# Altium PCB BCM_ECU_revA_V2.PcbDoc (part 3 of 4)
Units mm, origin at the board's own origin, x right, y up, seen from the top; angles counter-clockwise.
Board outline 170 x 110 mm, 4 copper layers (TOP SIG, GND, PWR, BOT SIG), stack 0.603 mm thick; 422 components, 413 nets, 1412 pads, 185 vias.
Unrouted connection lines stored in the file: 642.
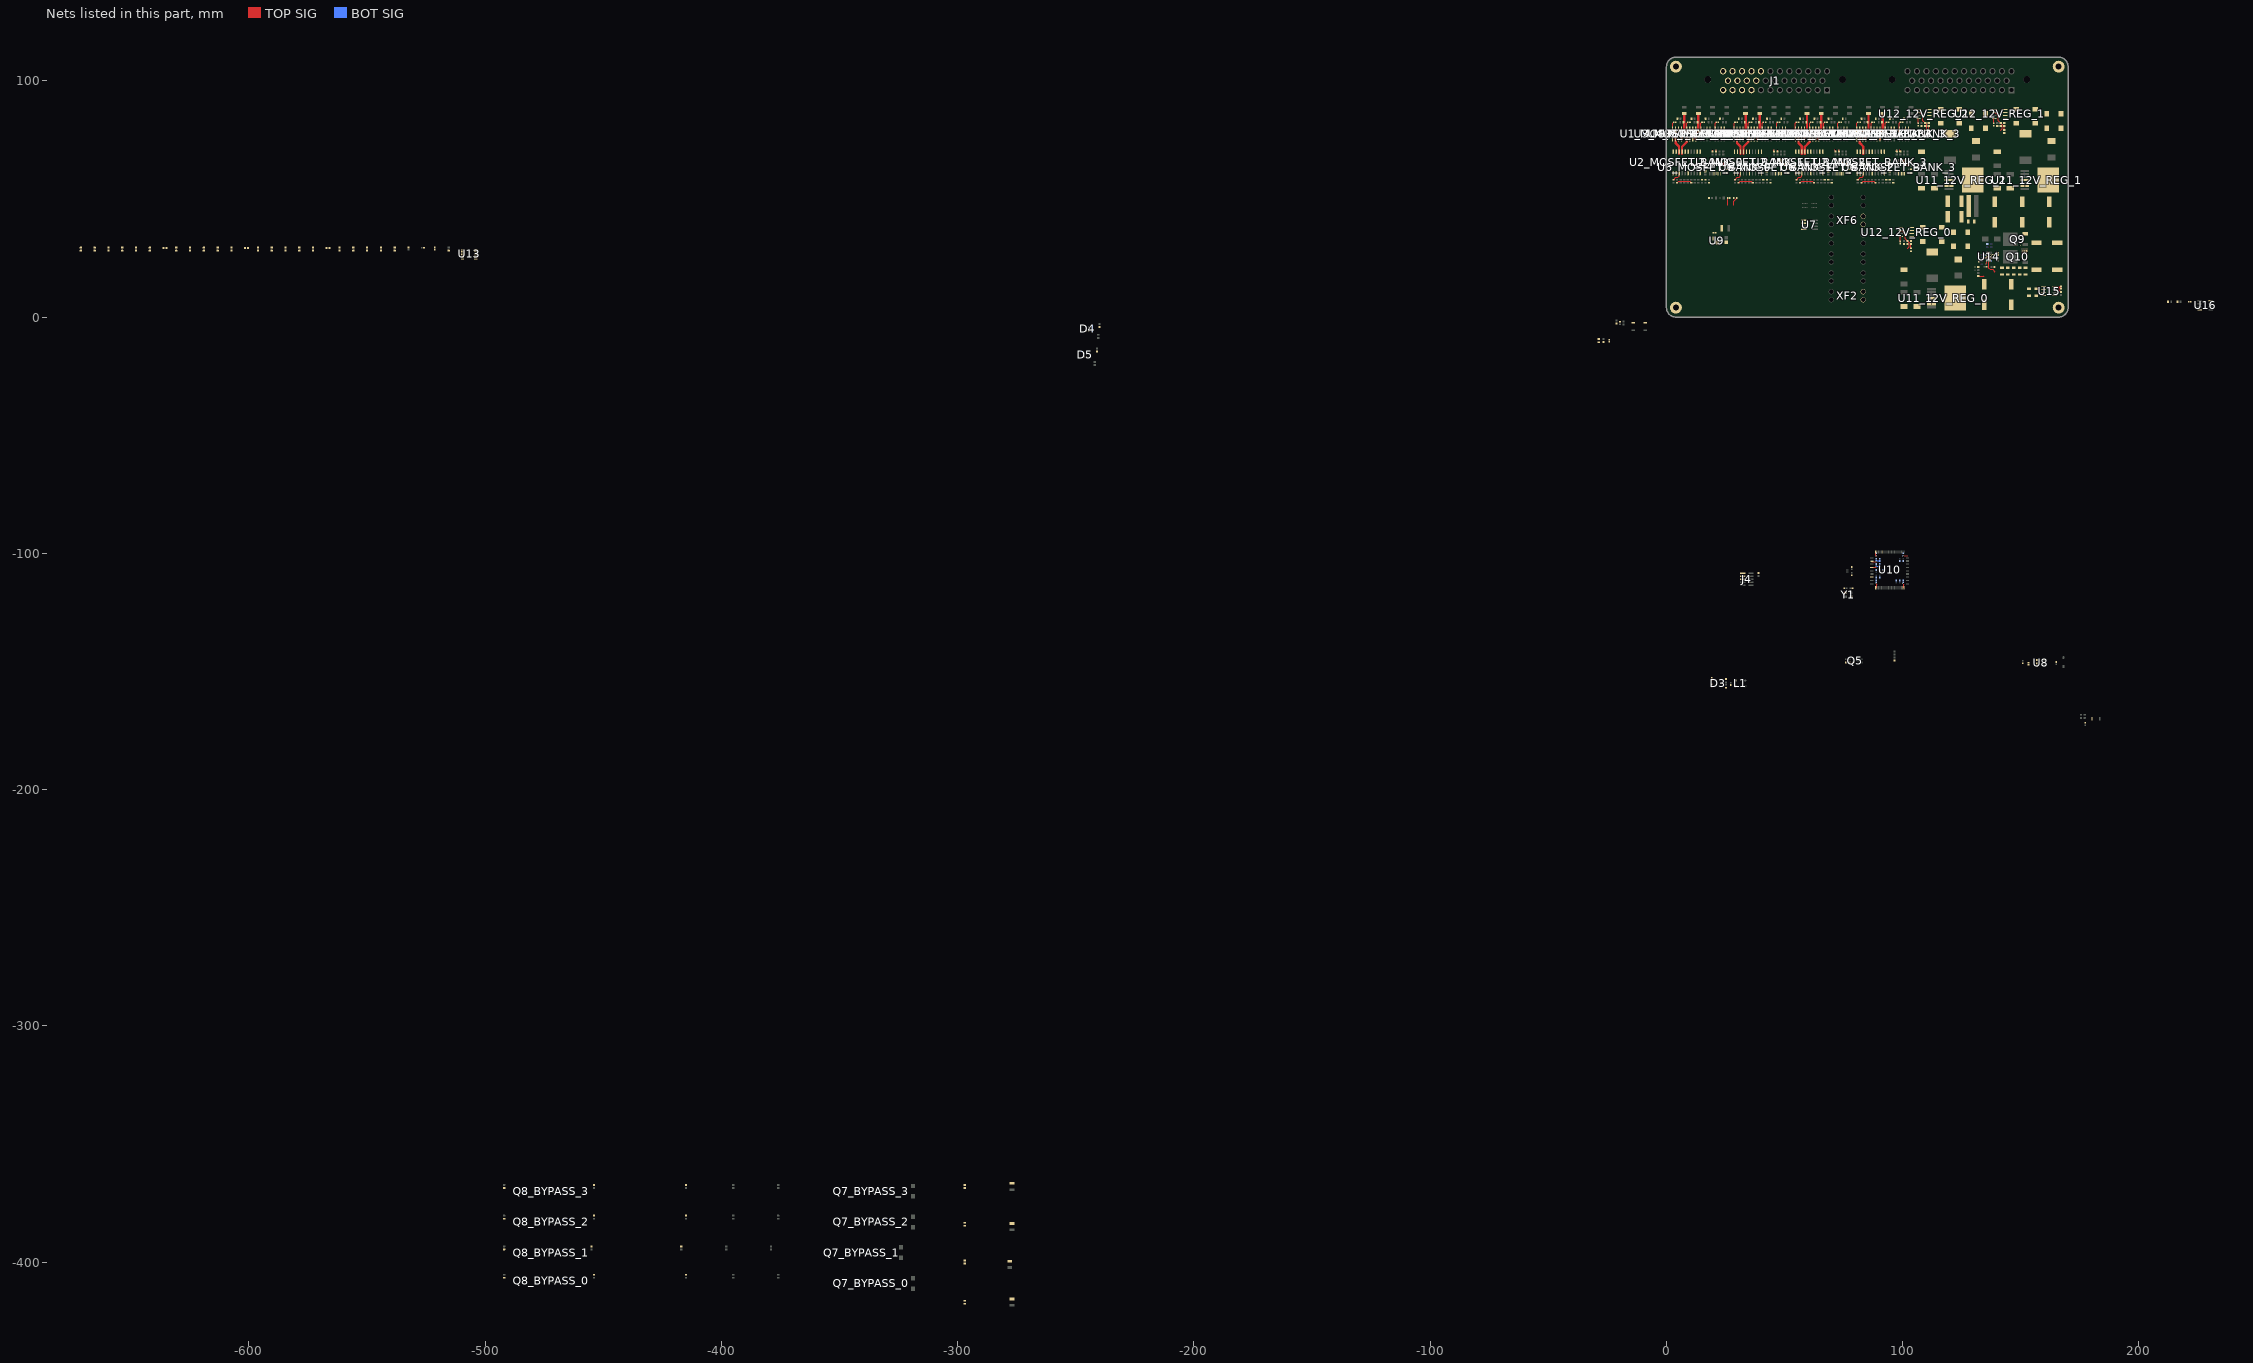
[diagram p3: the nets of this part, all layers, seen from the top]

## Via types
v1: diameter 0.5, hole 0.3, TOP SIG to BOT SIG, 181 vias
v2: diameter 0.5, hole 0.3, TOP SIG to BOT SIG, tented both sides, 4 vias

## Nets (pads, with @x,y where several pads share a name; then routed paths per layer and width w, separated by ;. In a path a pad name is that pad's centre, name@x,y a point inside that pad or via, vN(x,y) a via of type N, cw(c..) or ccw(c..) an arc to the next point about the centre after c; other vN are vias at no path point) (continued)
EXT_IN_2: F6_BYPASS_2.1 J1.31
EXT_IN_3: F6_BYPASS_3.1 J1.32
G_LED: R43.1 U10.15
GATE_BYPASS_0: Q7_BYPASS_0.4 R56_BYPASS_0.2 R57_BYPASS_0.1
GATE_BYPASS_1: Q7_BYPASS_1.4 R56_BYPASS_1.2 R57_BYPASS_1.1
GATE_BYPASS_2: Q7_BYPASS_2.4 R56_BYPASS_2.2 R57_BYPASS_2.1
GATE_BYPASS_3: Q7_BYPASS_3.4 R56_BYPASS_3.2 R57_BYPASS_3.1
GND: C1_MOSFET_BANK_0.2 C1_MOSFET_BANK_1.2 C1_MOSFET_BANK_2.2 C1_MOSFET_BANK_3.2 C2_MOSFET_BANK_0.2 C2_MOSFET_BANK_1.2 C2_MOSFET_BANK_2.2 C2_MOSFET_BANK_3.2 C3_MOSFET_BANK_0.2 C3_MOSFET_BANK_1.2 C3_MOSFET_BANK_2.2 C3_MOSFET_BANK_3.2 C4_MOSFET_BANK_0.2 C4_MOSFET_BANK_1.2 C4_MOSFET_BANK_2.2 C4_MOSFET_BANK_3.2 C5_MOSFET_BANK_0.2 C5_MOSFET_BANK_1.2 C5_MOSFET_BANK_2.2 C5_MOSFET_BANK_3.2 C6_MOSFET_BANK_0.2 C6_MOSFET_BANK_1.2 C6_MOSFET_BANK_2.2 C6_MOSFET_BANK_3.2 C7_MOSFET_BANK_0.2 C7_MOSFET_BANK_1.2 C7_MOSFET_BANK_2.2 C7_MOSFET_BANK_3.2 C8.2 C9.2 C10.2 C11.2 C12.2 C13.2 C14.1 C15.1 C16.2 C17.1 C18.2 C19.2 C20.2 C21.2 C23.2 C24.2 C25.2 C26.2 C27.2 C28.2 C29.2 C30.2 C31.2 C32.2 C33.2 C34.2 C35.2 C36.2 C37.2 C38.2 C39.2 C40_12V_REG_0.1 C40_12V_REG_1.1 C40_12V_REG_2.1 C41_12V_REG_0.1 C41_12V_REG_1.1 C41_12V_REG_2.1 C42_12V_REG_0.1 C42_12V_REG_1.1 C42_12V_REG_2.1 C43_12V_REG_0.1 C43_12V_REG_1.1 C43_12V_REG_2.1 C44_12V_REG_0.1 C44_12V_REG_1.1 C44_12V_REG_2.1 C45_12V_REG_0.1 C45_12V_REG_1.1 C45_12V_REG_2.1 C46_12V_REG_0.1 C46_12V_REG_1.1 C46_12V_REG_2.1 C48_12V_REG_0.2 C48_12V_REG_1.2 C48_12V_REG_2.2 C49.2 C50.2 C51.2 C52.1 C53.1 C54.1 C55.1 C56.1 C57.1 C58.1 C59.2 C60.2 C61.2 C62.2 C63.2 C64.2 C65.2 C67.2 C68.1 C69.2 C70.2 C71.2 C72.2 C73.2 C74.2 C75.2 C76.2 C77.2 D3.3 D6_12V_REG_0.2 D6_12V_REG_1.2 D6_12V_REG_2.2 D8.2 J4.3 J4.5 pad.2 Q5.2 Q8_BYPASS_0.1 Q8_BYPASS_1.1 Q8_BYPASS_2.1 Q8_BYPASS_3.1 Q10.3 R12_MOSFET_BANK_0.2 R12_MOSFET_BANK_1.2 R12_MOSFET_BANK_2.2 R12_MOSFET_BANK_3.2 R22_MOSFET_BANK_0.2 R22_MOSFET_BANK_1.2 R22_MOSFET_BANK_2.2 R22_MOSFET_BANK_3.2 R23_MOSFET_BANK_0.2 R23_MOSFET_BANK_1.2 R23_MOSFET_BANK_2.2 R23_MOSFET_BANK_3.2 R24_MOSFET_BANK_0.2 R24_MOSFET_BANK_1.2 R24_MOSFET_BANK_2.2 R24_MOSFET_BANK_3.2 R25_MOSFET_BANK_0.2 R25_MOSFET_BANK_1.2 R25_MOSFET_BANK_2.2 R25_MOSFET_BANK_3.2 R27.1 R31.1 R32.1 R41.1 R45.1 R48_12V_REG_0.2 R48_12V_REG_1.2 R48_12V_REG_2.2 R49_12V_REG_0.2 R49_12V_REG_1.2 R49_12V_REG_2.2 R57_BYPASS_0.2 R57_BYPASS_1.2 R57_BYPASS_2.2 R57_BYPASS_3.2 R59_BYPASS_0.1 R59_BYPASS_1.1 R59_BYPASS_2.1 R59_BYPASS_3.1 R77.1 R78.1 R79.1 R80.1 R81.1 R82.1 R83.1 R84.1 R91.2 R92.2 R94.2 SW1.1 SW3.2 U1_MOSFET_BANK_0.5 U1_MOSFET_BANK_1.5 U1_MOSFET_BANK_2.5 U1_MOSFET_BANK_3.5 U2_MOSFET_BANK_0.2 U2_MOSFET_BANK_0.6 U2_MOSFET_BANK_1.2 U2_MOSFET_BANK_1.6 U2_MOSFET_BANK_2.2 U2_MOSFET_BANK_2.6 U2_MOSFET_BANK_3.2 U2_MOSFET_BANK_3.6 U3_MOSFET_BANK_0.5 U3_MOSFET_BANK_1.5 U3_MOSFET_BANK_2.5 U3_MOSFET_BANK_3.5 U4_MOSFET_BANK_0.5 U4_MOSFET_BANK_1.5 U4_MOSFET_BANK_2.5 U4_MOSFET_BANK_3.5 U5_MOSFET_BANK_0.5 U5_MOSFET_BANK_1.5 U5_MOSFET_BANK_2.5 U5_MOSFET_BANK_3.5 U6_MOSFET_BANK_0.3 U6_MOSFET_BANK_0.12 U6_MOSFET_BANK_1.3 U6_MOSFET_BANK_1.12 U6_MOSFET_BANK_2.3 U6_MOSFET_BANK_2.12 U6_MOSFET_BANK_3.3 U6_MOSFET_BANK_3.12 U7.5 U8.2 U9.2 U10.10 U10.19 U10.26 U10.49 U10.74 U10.99 U11_12V_REG_0.4 U11_12V_REG_0.8 U11_12V_REG_1.4 U11_12V_REG_1.8 U11_12V_REG_2.4 U11_12V_REG_2.8 U12_12V_REG_0.5 U12_12V_REG_1.5 U12_12V_REG_2.5 U13.3 U13.12 U14.10 U14.14 U14.19 U14.21 U15.5 U16.4 Y1.2 Y1.4
  other v1: 150.5,27.25 151.25,27.25 152,27.25 152.75,27.25 139.749,27.5 150.5,28 151.25,28 152,28 152.75,28 150.5,28.75 151.25,28.75 152,28.75 152.75,28.75 149.5,30.25 149.5,31.25 22.62,50.396
  other v2: 135.95,24.95 137.05,24.95 135.95,26.05 137.05,26.05
I_nFAULT: R26.1 U7.6 | length 3.6
  TOP SIG w0.2: 28.505,47.312 28.505,49.056 29.77,50.321 R26.1@29.77,50.396
I_nFAULT_12V_REG_0: R50_12V_REG_0.2 U12_12V_REG_0.6 | length 9.7
  TOP SIG w0.3: U12_12V_REG_0.6@99.184,36.635 99.755,36.635 99.867,36.523 99.867,36.233 101,35.1 101,33.15 R50_12V_REG_0.2@102,32.15 102.075,32.15 102.727,31.498 102.727,29.802 102.075,29.15 102,29.15
I_nFAULT_12V_REG_1: R50_12V_REG_1.2 U12_12V_REG_1.6 | length 9.7
  TOP SIG w0.3: U12_12V_REG_1.6@138.684,86.635 139.255,86.635 139.367,86.523 139.367,86.233 140.5,85.1 140.5,83.15 R50_12V_REG_1.2@141.5,82.15 141.575,82.15 142.227,81.498 142.227,79.802 141.575,79.15 141.5,79.15
I_nFAULT_12V_REG_2: R50_12V_REG_2.2 U12_12V_REG_2.6 | length 9.7
  TOP SIG w0.3: U12_12V_REG_2.6@106.684,86.635 107.255,86.635 107.367,86.523 107.367,86.233 108.5,85.1 108.5,83.15 R50_12V_REG_2.2@109.5,82.15 109.575,82.15 110.227,81.498 110.227,79.802 109.575,79.15 109.5,79.15
I_nFAULT_MOSFET_BANK_0: R10_MOSFET_BANK_0.2 U1_MOSFET_BANK_0.6 U3_MOSFET_BANK_0.6 U4_MOSFET_BANK_0.6 U5_MOSFET_BANK_0.6 | length 15
  TOP SIG w0.3: v1@5,78.054 v1@5.135,78.189 ; v1@5,78.054 v1(5,78) v1@5,78.054 ; v1@5,78.054 v1@5.135,78.189 ; v1@5.135,78.189 U1_MOSFET_BANK_0.6@5.135,79.816 v1@5.135,78.189 ; v1@11,78.054 v1@11.135,78.189 ; v1@11,78.054 v1(11,78) v1@11,78.054 ; v1@11,78.054 v1@11.135,78.189 ; v1@11.135,78.189 U3_MOSFET_BANK_0.6@11.135,79.816 v1@11.135,78.189 ; v1@17,78.054 v1@17.135,78.189 ; v1@17,78.054 v1(17,78) v1@17,78.054 ; v1@17,78.054 v1@17.135,78.189 ; v1@17.135,78.189 U4_MOSFET_BANK_0.6@17.135,79.816 v1@17.135,78.189 ; v1@23,78.054 v1@23.135,78.189 ; v1@23,78.054 v1(23,78) v1@23,78.054 ; v1@23,78.054 v1@23.135,78.189 ; v1@23.135,78.189 U5_MOSFET_BANK_0.6@23.135,79.816 v1@23.135,78.189
  other v1: 5,78 11,78 17,78 23,78
I_nFAULT_MOSFET_BANK_1: R10_MOSFET_BANK_1.2 U1_MOSFET_BANK_1.6 U3_MOSFET_BANK_1.6 U4_MOSFET_BANK_1.6 U5_MOSFET_BANK_1.6 | length 15
  TOP SIG w0.3: v1@31,78.054 v1@31.135,78.189 ; v1@31,78.054 v1@31.135,78.189 ; v1@31,78.054 v1(31,78) v1@31,78.054 ; v1@31.135,78.189 U1_MOSFET_BANK_1.6@31.135,79.816 v1@31.135,78.189 ; v1@37,78.054 v1@37.135,78.189 ; v1@37,78.054 v1@37.135,78.189 ; v1@37,78.054 v1(37,78) v1@37,78.054 ; v1@37.135,78.189 U3_MOSFET_BANK_1.6@37.135,79.816 v1@37.135,78.189 ; v1@43,78.054 v1@43.135,78.189 ; v1@43,78.054 v1@43.135,78.189 ; v1@43,78.054 v1(43,78) v1@43,78.054 ; v1@43.135,78.189 U4_MOSFET_BANK_1.6@43.135,79.816 v1@43.135,78.189 ; v1@49,78.054 v1@49.135,78.189 ; v1@49,78.054 v1@49.135,78.189 ; v1@49,78.054 v1(49,78) v1@49,78.054 ; v1@49.135,78.189 U5_MOSFET_BANK_1.6@49.135,79.816 v1@49.135,78.189
  other v1: 31,78 37,78 43,78 49,78
I_nFAULT_MOSFET_BANK_2: R10_MOSFET_BANK_2.2 U1_MOSFET_BANK_2.6 U3_MOSFET_BANK_2.6 U4_MOSFET_BANK_2.6 U5_MOSFET_BANK_2.6 | length 15
  TOP SIG w0.3: v1@57,78.054 v1@57.135,78.189 ; v1@57,78.054 v1@57.135,78.189 ; v1@57,78.054 v1(57,78) v1@57,78.054 ; v1@57.135,78.189 U1_MOSFET_BANK_2.6@57.135,79.816 v1@57.135,78.189 ; v1@63,78.054 v1@63.135,78.189 ; v1@63,78.054 v1@63.135,78.189 ; v1@63,78.054 v1(63,78) v1@63,78.054 ; v1@63.135,78.189 U3_MOSFET_BANK_2.6@63.135,79.816 v1@63.135,78.189 ; v1@69,78.054 v1@69.135,78.189 ; v1@69,78.054 v1@69.135,78.189 ; v1@69,78.054 v1(69,78) v1@69,78.054 ; v1@69.135,78.189 U4_MOSFET_BANK_2.6@69.135,79.816 v1@69.135,78.189 ; v1@75,78.054 v1@75.135,78.189 ; v1@75,78.054 v1@75.135,78.189 ; v1@75,78.054 v1(75,78) v1@75,78.054 ; v1@75.135,78.189 U5_MOSFET_BANK_2.6@75.135,79.816 v1@75.135,78.189
  other v1: 57,78 63,78 69,78 75,78
I_nFAULT_MOSFET_BANK_3: R10_MOSFET_BANK_3.2 U1_MOSFET_BANK_3.6 U3_MOSFET_BANK_3.6 U4_MOSFET_BANK_3.6 U5_MOSFET_BANK_3.6 | length 15
  TOP SIG w0.3: v1@83,78.054 v1@83.135,78.189 ; v1@83,78.054 v1@83.135,78.189 ; v1@83,78.054 v1(83,78) v1@83,78.054 ; v1@83.135,78.189 U1_MOSFET_BANK_3.6@83.135,79.816 v1@83.135,78.189 ; v1@89,78.054 v1@89.135,78.189 ; v1@89,78.054 v1@89.135,78.189 ; v1@89,78.054 v1(89,78) v1@89,78.054 ; v1@89.135,78.189 U3_MOSFET_BANK_3.6@89.135,79.816 v1@89.135,78.189 ; v1@95,78.054 v1@95.135,78.189 ; v1@95,78.054 v1@95.135,78.189 ; v1@95,78.054 v1(95,78) v1@95,78.054 ; v1@95.135,78.189 U4_MOSFET_BANK_3.6@95.135,79.816 v1@95.135,78.189 ; v1@101,78.054 v1@101.135,78.189 ; v1@101,78.054 v1@101.135,78.189 ; v1@101,78.054 v1(101,78) v1@101,78.054 ; v1@101.135,78.189 U5_MOSFET_BANK_3.6@101.135,79.816 v1@101.135,78.189
  other v1: 83,78 89,78 95,78 101,78
IN_0: J1.9 R61.1 R69.2
IN_1: J1.10 R62.1 R70.2
IN_2: J1.11 R63.1 R71.2
IN_3: J1.12 R64.1 R72.2
IN_4: J1.22 R65.1 R73.2
IN_5: J1.23 R66.1 R74.2
IN_6: J1.33 R67.1 R75.2
IN_7: R68.1 R76.2
INH_EXT_0: R58_BYPASS_0.2
INH_EXT_1: R58_BYPASS_1.2
INH_EXT_2: R58_BYPASS_2.2
INH_EXT_3: R58_BYPASS_3.2
INT_VCC: C16.1 F1.2 U9.3
M1_I_SENSE_MOSFET_BANK_0: R17_MOSFET_BANK_0.2 U1_MOSFET_BANK_0.7 | length 4.6
  TOP SIG w0.3: R17_MOSFET_BANK_0.2@19.5,70.15 v1(19.5,71) ; v1@3.865,78.189 U1_MOSFET_BANK_0.7@3.865,79.816 v1@3.865,78.189 ; v1@3.865,78.189 v1@4,78.054 ; v1@3.865,78.189 v1@4,78.054 ; v1@4,78.054 v1(4,78) v1@4,78.054
  other v1: 4,78
M1_I_SENSE_MOSFET_BANK_1: R17_MOSFET_BANK_1.2 U1_MOSFET_BANK_1.7 | length 4.6
  TOP SIG w0.3: R17_MOSFET_BANK_1.2@45.5,70.15 v1(45.5,71) ; v1@29.865,78.189 U1_MOSFET_BANK_1.7@29.865,79.816 v1@29.865,78.189 ; v1@29.865,78.189 v1@30,78.054 ; v1@29.865,78.189 v1@30,78.054 ; v1@30,78.054 v1(30,78) v1@30,78.054
  other v1: 30,78
M1_I_SENSE_MOSFET_BANK_2: R17_MOSFET_BANK_2.2 U1_MOSFET_BANK_2.7 | length 4.6
  TOP SIG w0.3: R17_MOSFET_BANK_2.2@71.5,70.15 v1(71.5,71) ; v1@55.865,78.189 v1@56,78.054 ; v1@55.865,78.189 U1_MOSFET_BANK_2.7@55.865,79.816 v1@55.865,78.189 ; v1@55.865,78.189 v1@56,78.054 ; v1@56,78.054 v1(56,78) v1@56,78.054
  other v1: 56,78
M1_I_SENSE_MOSFET_BANK_3: R17_MOSFET_BANK_3.2 U1_MOSFET_BANK_3.7 | length 4.6
  TOP SIG w0.3: R17_MOSFET_BANK_3.2@97.5,70.15 v1(97.5,71) ; v1@81.865,78.189 v1@82,78.054 ; v1@81.865,78.189 U1_MOSFET_BANK_3.7@81.865,79.816 v1@81.865,78.189 ; v1@81.865,78.189 v1@82,78.054 ; v1@82,78.054 v1(82,78) v1@82,78.054
  other v1: 82,78
M1_OUT_MOSFET_BANK_0: F2_MOSFET_BANK_0.1 R18_MOSFET_BANK_0.2 U1_MOSFET_BANK_0.3 U1_MOSFET_BANK_0.4 | length 11.4
  TOP SIG w1: U1_MOSFET_BANK_0.4@6.405,75.184 6.405,77.405 7,78 7.5,78.5 F2_MOSFET_BANK_0.1@7.5,86.167
M1_OUT_MOSFET_BANK_1: F2_MOSFET_BANK_1.1 R18_MOSFET_BANK_1.2 U1_MOSFET_BANK_1.3 U1_MOSFET_BANK_1.4 | length 11.4
  TOP SIG w1: U1_MOSFET_BANK_1.4@32.405,75.184 32.405,77.405 33,78 33.5,78.5 F2_MOSFET_BANK_1.1@33.5,86.167
M1_OUT_MOSFET_BANK_2: F2_MOSFET_BANK_2.1 R18_MOSFET_BANK_2.2 U1_MOSFET_BANK_2.3 U1_MOSFET_BANK_2.4 | length 11.4
  TOP SIG w1: U1_MOSFET_BANK_2.4@58.405,75.184 58.405,77.405 59,78 59.5,78.5 F2_MOSFET_BANK_2.1@59.5,86.167
M1_OUT_MOSFET_BANK_3: F2_MOSFET_BANK_3.1 R18_MOSFET_BANK_3.2 U1_MOSFET_BANK_3.3 U1_MOSFET_BANK_3.4 | length 11.4
  TOP SIG w1: U1_MOSFET_BANK_3.4@84.405,75.184 84.405,77.405 85,78 85.5,78.5 F2_MOSFET_BANK_3.1@85.5,86.167
M1_PRE_SHUNT_MOSFET_BANK_0: U1_MOSFET_BANK_0.1 U1_MOSFET_BANK_0.2 U2_MOSFET_BANK_0.18 | length 7.7
  TOP SIG w1: 3.865,76.121 U1_MOSFET_BANK_0.2@3.865,75.184 3.865,73.635 5.325,72.175 U2_MOSFET_BANK_0.18@5.325,70.05 5.325,69.075
M1_PRE_SHUNT_MOSFET_BANK_1: U1_MOSFET_BANK_1.1 U1_MOSFET_BANK_1.2 U2_MOSFET_BANK_1.18 | length 7.7
  TOP SIG w1: 29.865,76.121 U1_MOSFET_BANK_1.2@29.865,75.184 29.865,73.635 31.325,72.175 U2_MOSFET_BANK_1.18@31.325,70.05 31.325,69.075
M1_PRE_SHUNT_MOSFET_BANK_2: U1_MOSFET_BANK_2.1 U1_MOSFET_BANK_2.2 U2_MOSFET_BANK_2.18 | length 7.7
  TOP SIG w1: 55.865,76.121 U1_MOSFET_BANK_2.2@55.865,75.184 55.865,73.635 57.325,72.175 U2_MOSFET_BANK_2.18@57.325,70.05 57.325,69.075
M1_PRE_SHUNT_MOSFET_BANK_3: U1_MOSFET_BANK_3.1 U1_MOSFET_BANK_3.2 U2_MOSFET_BANK_3.18 | length 7.7
  TOP SIG w1: 81.865,76.121 U1_MOSFET_BANK_3.2@81.865,75.184 81.865,73.635 83.325,72.175 U2_MOSFET_BANK_3.18@83.325,70.05 83.325,69.075
M1_TRIG_MOSFET_BANK_0: R1_MOSFET_BANK_0.2 U2_MOSFET_BANK_0.3 | length 4.3
  TOP SIG w0.3: R1_MOSFET_BANK_0.2@3,58.15 3.075,58.15 4.025,59.1 4.8,59.1 5.325,59.625 U2_MOSFET_BANK_0.3@5.325,60.95
M1_TRIG_MOSFET_BANK_1: R1_MOSFET_BANK_1.2 U2_MOSFET_BANK_1.3 | length 4.3
  TOP SIG w0.3: R1_MOSFET_BANK_1.2@29,58.15 29.075,58.15 30.025,59.1 30.8,59.1 31.325,59.625 U2_MOSFET_BANK_1.3@31.325,60.95
M1_TRIG_MOSFET_BANK_2: R1_MOSFET_BANK_2.2 U2_MOSFET_BANK_2.3 | length 4.3
  TOP SIG w0.3: R1_MOSFET_BANK_2.2@55,58.15 55.075,58.15 56.025,59.1 56.8,59.1 57.325,59.625 U2_MOSFET_BANK_2.3@57.325,60.95
M1_TRIG_MOSFET_BANK_3: R1_MOSFET_BANK_3.2 U2_MOSFET_BANK_3.3 | length 4.3
  TOP SIG w0.3: R1_MOSFET_BANK_3.2@81,58.15 81.075,58.15 82.025,59.1 82.8,59.1 83.325,59.625 U2_MOSFET_BANK_3.3@83.325,60.95
M2_I_SENSE_MOSFET_BANK_0: R15_MOSFET_BANK_0.2 U3_MOSFET_BANK_0.7 | length 4.6
  TOP SIG w0.3: R15_MOSFET_BANK_0.2@21,70.15 v1(21,71) ; v1@9.865,78.189 U3_MOSFET_BANK_0.7@9.865,79.816 v1@9.865,78.189 ; v1@9.865,78.189 v1@10,78.054 ; v1@9.865,78.189 v1@10,78.054 ; v1@10,78.054 v1(10,78) v1@10,78.054
  other v1: 10,78
M2_I_SENSE_MOSFET_BANK_1: R15_MOSFET_BANK_1.2 U3_MOSFET_BANK_1.7 | length 4.6
  TOP SIG w0.3: R15_MOSFET_BANK_1.2@47,70.15 v1(47,71) ; v1@35.865,78.189 U3_MOSFET_BANK_1.7@35.865,79.816 v1@35.865,78.189 ; v1@35.865,78.189 v1@36,78.054 ; v1@35.865,78.189 v1@36,78.054 ; v1@36,78.054 v1(36,78) v1@36,78.054
  other v1: 36,78
M2_I_SENSE_MOSFET_BANK_2: R15_MOSFET_BANK_2.2 U3_MOSFET_BANK_2.7 | length 4.6
  TOP SIG w0.3: R15_MOSFET_BANK_2.2@73,70.15 v1(73,71) ; v1@61.865,78.189 v1@62,78.054 ; v1@61.865,78.189 U3_MOSFET_BANK_2.7@61.865,79.816 v1@61.865,78.189 ; v1@61.865,78.189 v1@62,78.054 ; v1@62,78.054 v1(62,78) v1@62,78.054
  other v1: 62,78
M2_I_SENSE_MOSFET_BANK_3: R15_MOSFET_BANK_3.2 U3_MOSFET_BANK_3.7 | length 4.6
  TOP SIG w0.3: R15_MOSFET_BANK_3.2@99,70.15 v1(99,71) ; v1@87.865,78.189 v1@88,78.054 ; v1@87.865,78.189 U3_MOSFET_BANK_3.7@87.865,79.816 v1@87.865,78.189 ; v1@87.865,78.189 v1@88,78.054 ; v1@88,78.054 v1(88,78) v1@88,78.054
  other v1: 88,78
M2_OUT_MOSFET_BANK_0: F3_MOSFET_BANK_0.1 R19_MOSFET_BANK_0.2 U3_MOSFET_BANK_0.3 U3_MOSFET_BANK_0.4 | length 11.4
  TOP SIG w1: U3_MOSFET_BANK_0.4@12.405,75.184 12.405,77.405 13,78 13.5,78.5 F3_MOSFET_BANK_0.1@13.5,86.167
M2_OUT_MOSFET_BANK_1: F3_MOSFET_BANK_1.1 R19_MOSFET_BANK_1.2 U3_MOSFET_BANK_1.3 U3_MOSFET_BANK_1.4 | length 11.4
  TOP SIG w1: U3_MOSFET_BANK_1.4@38.405,75.184 38.405,77.405 39,78 39.5,78.5 F3_MOSFET_BANK_1.1@39.5,86.167
M2_OUT_MOSFET_BANK_2: F3_MOSFET_BANK_2.1 R19_MOSFET_BANK_2.2 U3_MOSFET_BANK_2.3 U3_MOSFET_BANK_2.4 | length 11.4
  TOP SIG w1: U3_MOSFET_BANK_2.4@64.405,75.184 64.405,77.405 65,78 65.5,78.5 F3_MOSFET_BANK_2.1@65.5,86.167
M2_OUT_MOSFET_BANK_3: F3_MOSFET_BANK_3.1 R19_MOSFET_BANK_3.2 U3_MOSFET_BANK_3.3 U3_MOSFET_BANK_3.4 | length 11.4
  TOP SIG w1: U3_MOSFET_BANK_3.4@90.405,75.184 90.405,77.405 91,78 91.5,78.5 F3_MOSFET_BANK_3.1@91.5,86.167
M2_PRE_SHUNT_MOSFET_BANK_0: U2_MOSFET_BANK_0.17 U3_MOSFET_BANK_0.1 U3_MOSFET_BANK_0.2 | length 7.9
  TOP SIG w1: 6.595,69.075 U2_MOSFET_BANK_0.17@6.595,70.05 6.595,72.095 8.595,74.095 U3_MOSFET_BANK_0.1@8.595,75.184 8.595,76.121
M2_PRE_SHUNT_MOSFET_BANK_1: U2_MOSFET_BANK_1.17 U3_MOSFET_BANK_1.1 U3_MOSFET_BANK_1.2 | length 7.9
  TOP SIG w1: 32.595,69.075 U2_MOSFET_BANK_1.17@32.595,70.05 32.595,72.095 34.595,74.095 U3_MOSFET_BANK_1.1@34.595,75.184 34.595,76.121
M2_PRE_SHUNT_MOSFET_BANK_2: U2_MOSFET_BANK_2.17 U3_MOSFET_BANK_2.1 U3_MOSFET_BANK_2.2 | length 7.9
  TOP SIG w1: 58.595,69.075 U2_MOSFET_BANK_2.17@58.595,70.05 58.595,72.095 60.595,74.095 U3_MOSFET_BANK_2.1@60.595,75.184 60.595,76.121

## Text inside footprints (layer, text, board x,y; h text height)
U8: Top 3D Body "*" at 157.398,-145.571 h1.27; Top Overlay "*" at 156.274,-144.693 h1.27